# Altium PCB Linker.PcbDoc
Units mil, origin at the board's own origin, x right, y up, seen from the top; angles counter-clockwise.
Board outline 1978.54 x 1980.45 mil, 2 copper layers (Top Layer, Bottom Layer); 10 components, 0 nets, 42 pads, 0 vias.
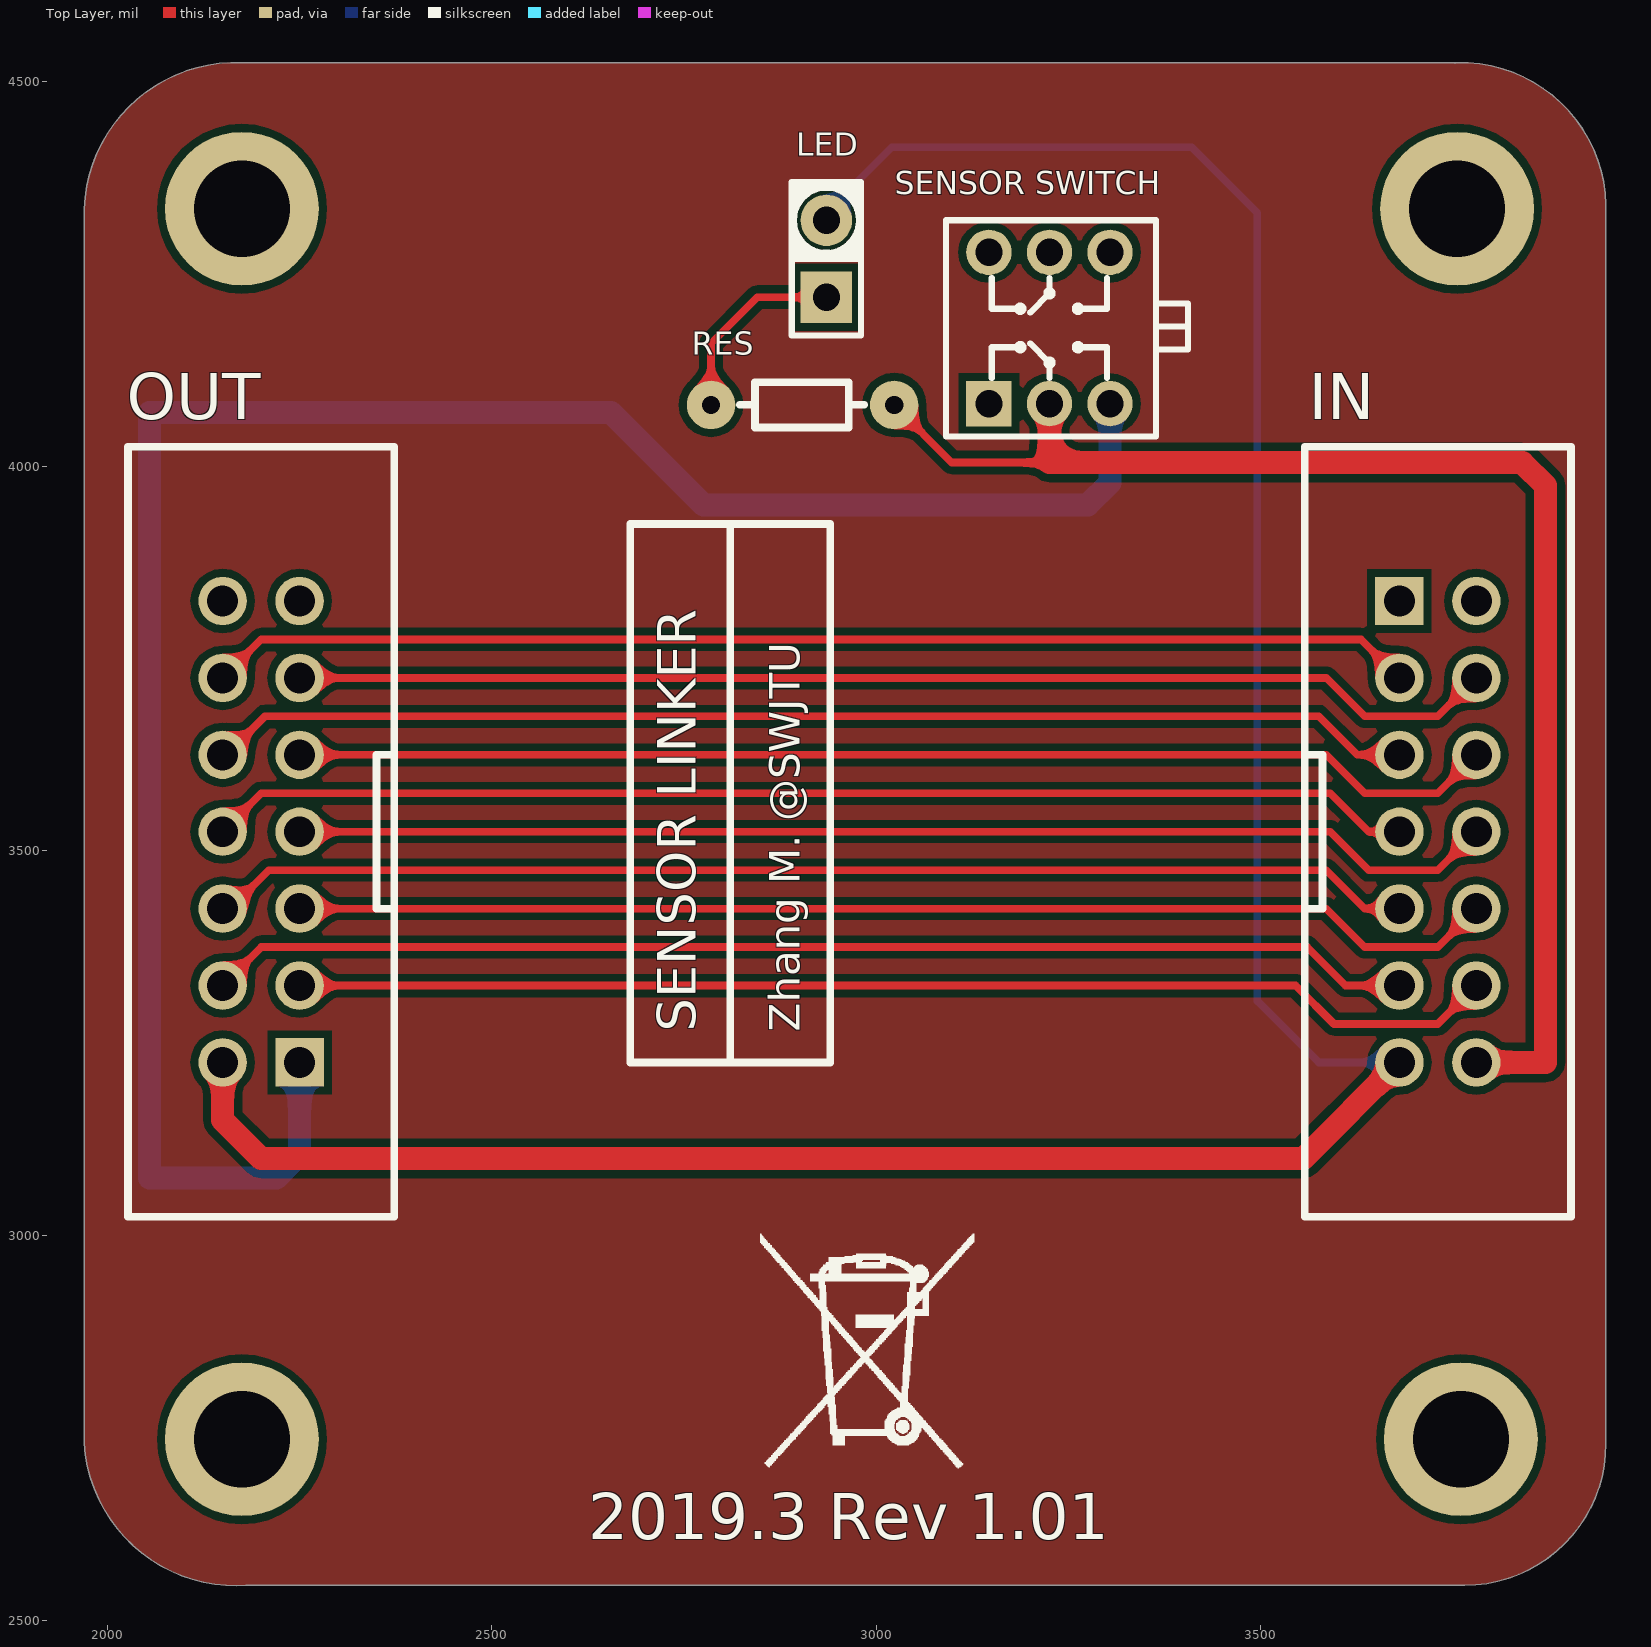
[diagram p0: Top Layer view]
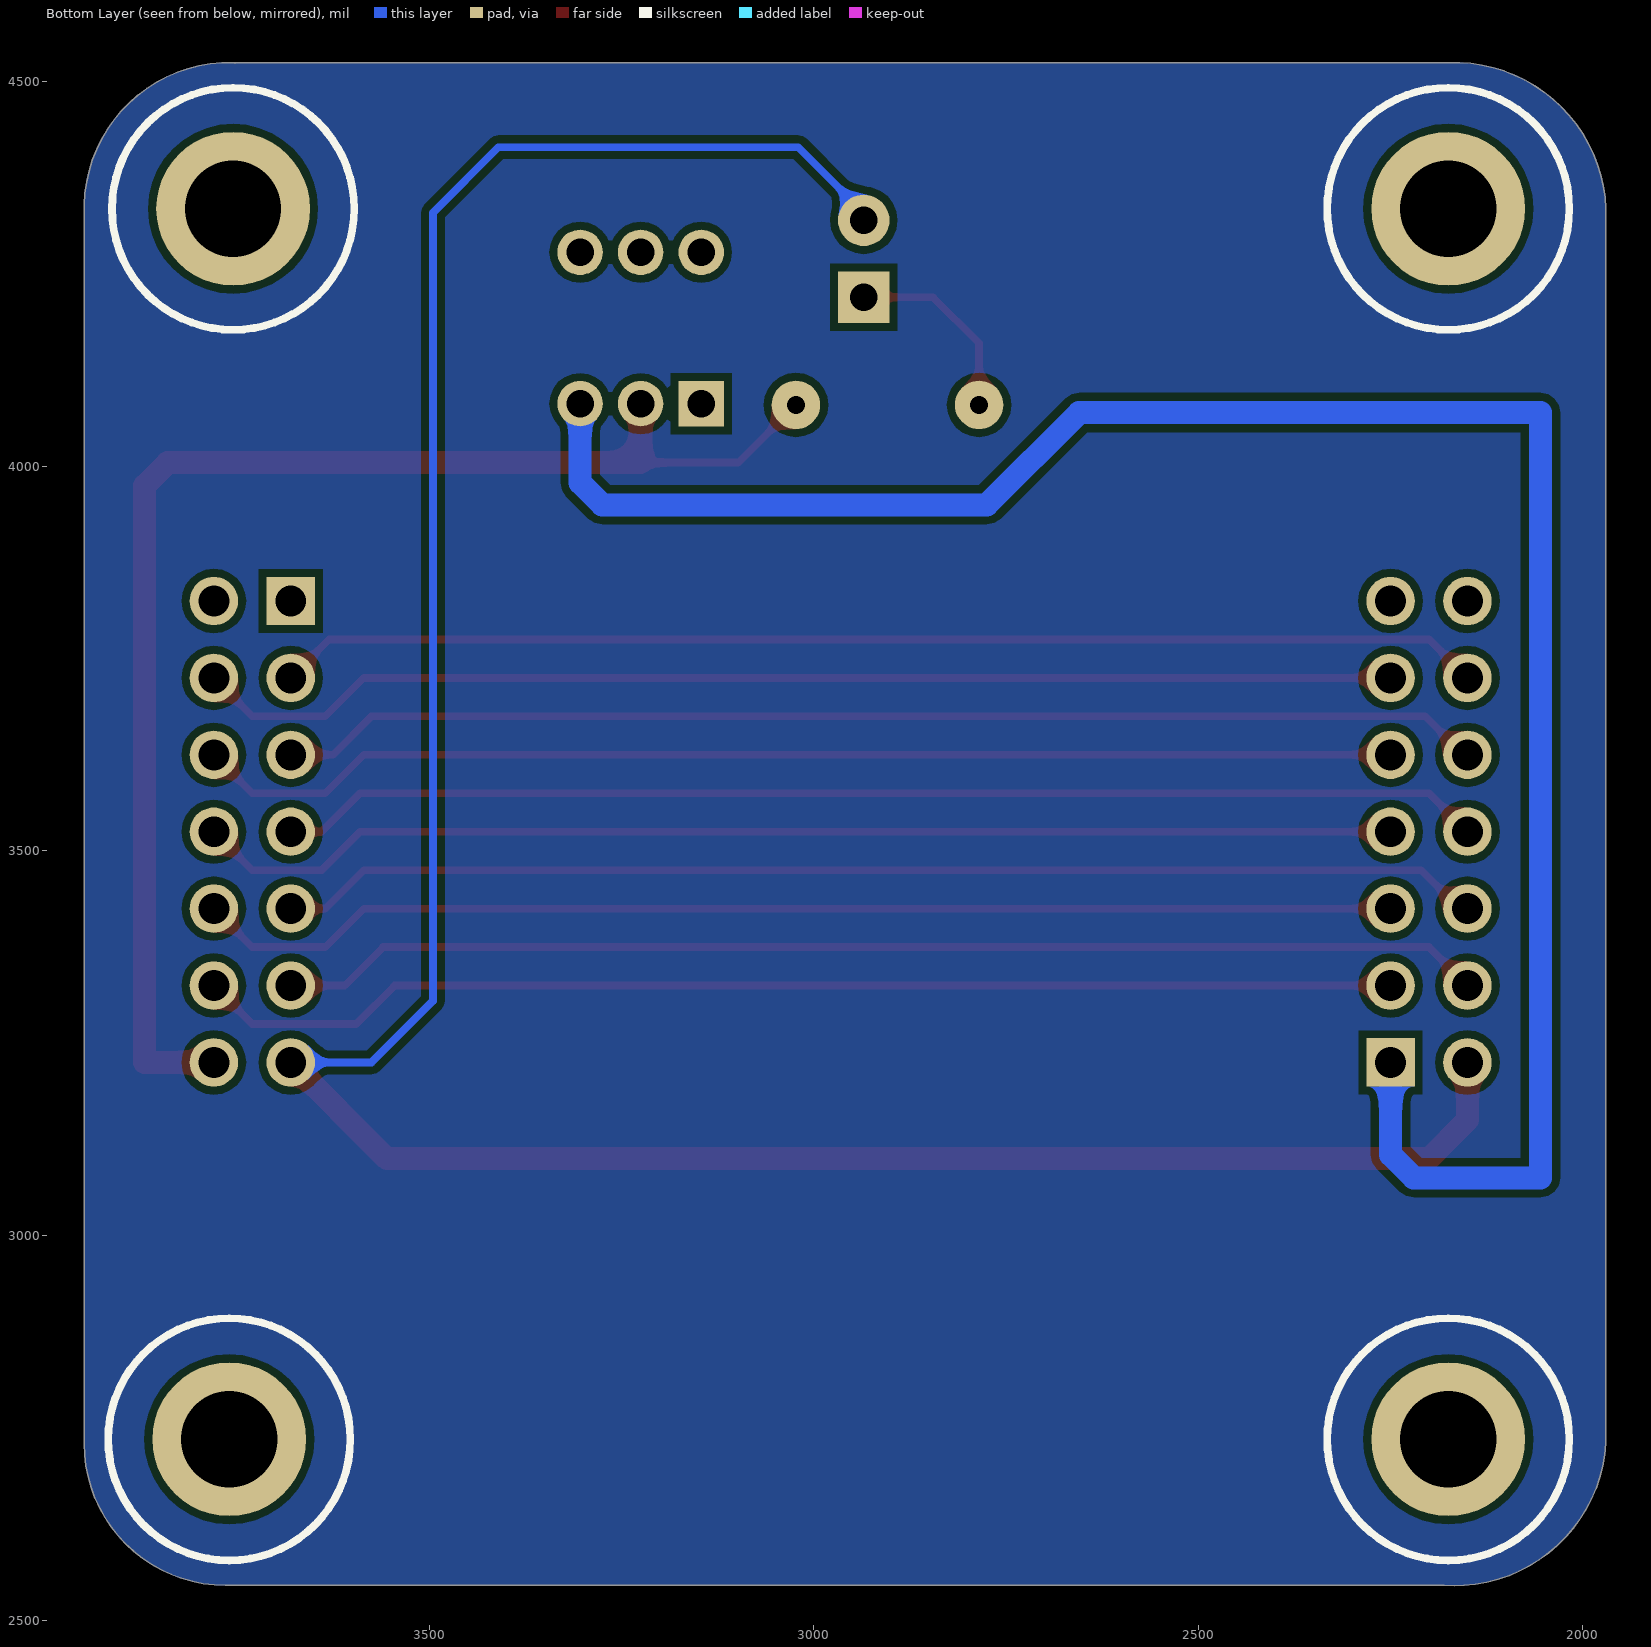
[diagram p1: Bottom Layer view, seen from below]

## Layer stack, top to bottom
Top Solder: solder mask 0.4, Solder Resist, Dk 3.5
Top Layer: signal copper 1.4
Dielectric 1: dielectric 12.6, FR-4, Dk 4.8
Bottom Layer: signal copper 1.4
Bottom Solder: solder mask 0.4, Solder Resist, Dk 3.5

## Board outline
1970,2729.68 cw(c1975,2730) 1969.98,2730 1969.98,4335 cw(c1975,4335) 1969.99,4335.2 cw(c2167.5,4327.5) 2175.1,4525.02 3750,4525.02 cw(c3750,4520) 3752.5,4524.35 cw(c3755,4520) 3754.88,4525.01 cw(c3759.25,4335.75) 3948.52,4340.12 cw(c3943.5,4340) 3948.52,4340 cw(c3943.5,4340) 3948.52,4339.94 3948.52,2730.05 cw(c3943.5,2730) 3948.52,2730.02 cw(c3764.25,2729.25) 3948.52,2729.25 cw(c3764.25,2729.25) 3765.02,2544.99 cw(c3765,2550) 3765,2544.99 2180.16,2544.99 cw(c2167.5,2742.5) 2154.68,2545 cw(c2167.5,2742.5)

## Design rules (kind name [scope] priority, off if disabled: settings)
Clearance [All] p1: gap=10 ignorepadtopadclearanceinfootprint=FALSE except(0: Arc-Hole Track-Hole SMDPad-Hole THPad-Hole Via-Hole Fill-Hole Poly-Hole Region-Hole Text-Hole)
PolygonConnect [All] p1: connectstyle=Relief reliefconductorwidth=10 reliefentries=4 polygonreliefangle="90 Angle" airgapwidth=10
RoutingVias [All] p1: holewidth=28 width=50 viastyle="Through Hole" minholewidth=28 minwidth=50 maxholewidth=28 maxwidth=50
SolderMaskExpansion [All] p1: expansion=4
Width [All] p1: maxlimit=100 minlimit=10 preferedwidth=10 minimp=50.000000 maximp=50.000000 favimp=50.000000
30 further rules are at their usual default settings.

## Components (designator, comment, footprint, x,y, rotation, side; value= is the part's Value field where it differs from the comment)
IN "Comment" DC-2.54-L-Z-14P 3730,3525 r270 top
LED "Comment" "LED F257-Y" 2935,4270 r90 top
OUT "Comment" DC-2.54-L-Z-14P 2200,3525 r90 top
RES "Comment" "RS 1/8W" 2905,4080 r0 top
"SENSOR SWITCH" "Comment" "KFT DIP-7X7" 3225,4180 r0 top
? "Comment" ICO3 2990,2850 r0 top
? "Comment" M3x8+6_L 3760,2735 r270 bottom
? "Comment" M3x8+6_L 2175,2735 r270 bottom
? "Comment" M3x8+6_L 3755,4335 r270 bottom
? "Comment" M3x8+6_L 2175,4335 r270 bottom

## Footprints (in the part's own frame and the unit in brackets; to place one, negate y for a bottom-side part, rotate by r counter-clockwise, add the part's x,y. Pads: shape width x height; smd on the part's side, far side on the other; paste and mask are expansions set on the pad)
DC-2.54-L-Z-14P [mm] "立式直插简牛插座，间距2.54（蒜米工坊）"
  rect 1.6x1.6 hole 1.02: 1(-7.62,-1.27)
  round 1.6 hole 1.02: 2(-7.62,1.27) 3(-5.08,-1.27) 4(-5.08,1.27) 5(-2.54,-1.27) 6(-2.54,1.27) 7(0,-1.27) 8(0,1.27) 9(2.54,-1.27) 10(2.54,1.27) 11(5.08,-1.27) 12(5.08,1.27) 13(7.62,-1.27) 14(7.62,1.27)
  silkscreen extent -12.72,-4.4 12.72,4.4, body extent -12.72,-4.4 12.71,4.7, height 8.8
ICO3 [mil]
  silkscreen extent -141,-152 137,152
"KFT DIP-7X7" [mm] "自锁开关，规格：7*7mm"
  rect 1.5x1.5 hole 0.9: 1(-2,-2.5)
  round 1.5 hole 0.9: 2(0,-2.5) 3(2,-2.5) 4(2,2.5) 5(0,2.5) 6(-2,2.5)
  silkscreen extent -3.42,-3.58 4.58,3.56, body extent -3.5,-3.5 3.5,3.5, height 11.2
"LED F257-Y" [mm] "黄色2mm*5mm*7mm(长*宽*高)"
  rect 1.7x1.7 hole 0.9: 1(-1.27,0)
  round 1.7 hole 0.9: 2(1.27,0)
  silkscreen extent -2.54,-1.14 2.54,1.14, body extent -2.5,-1 2.5,1, height 7.05
M3x8+6_L [mil] "M3铜柱，长：8mm，螺纹长：6mm"
  round 200 hole 125: 1(0,0)
  silkscreen extent -157,-157 157,157, body extent -106,-93 106,93, height 317
"RS 1/8W" [mm] "直插色环电阻，脚距6mm，直径1.5mm"
  round 1.6 hole 0.6: 1(-3.048,0) 2(3,0)
  silkscreen extent -2.1,-0.75 2,0.75, body extent -3.22,-0.76 3.23,0.76, height 1.52

## Nets (pads, with @x,y where several pads share a name; then routed paths per layer and width w, separated by ;. In a path a pad name is that pad's centre, name@x,y a point inside that pad or via, vN(x,y) a via of type N, cw(c..) or ccw(c..) an arc to the next point about the centre after c; other vN are vias at no path point)
pads on no net: "SENSOR SWITCH.1" "SENSOR SWITCH.2" "SENSOR SWITCH.3" "SENSOR SWITCH.4" "SENSOR SWITCH.5" "SENSOR SWITCH.6" ?.1 IN.1 IN.2 IN.3 IN.4 IN.5 IN.6 IN.7 IN.8 IN.9 IN.10 IN.11 IN.12 IN.13 IN.14 LED.1 LED.2 OUT.1 OUT.2 OUT.3 OUT.4 OUT.5 OUT.6 OUT.7 OUT.8 OUT.9 OUT.10 OUT.11 OUT.12 OUT.13 OUT.14 RES.1 RES.2
copper on no net: | length 24082.7
  Top Layer w10: 2140,3725 2150,3725 2200,3775 3630,3775 3680,3725 ; 2150,3325 2200,3375 3560,3375 3610,3325 3680,3325 ; 2150,3425 2160,3425 2210,3475 3585,3475 3635,3425 3680,3425 ; 2150,3525 2200,3575 3590,3575 3640,3525 3680,3525 ; 2150,3625 2155,3625 2205,3675 3575,3675 3625,3625 3680,3625 ; 2250,3325 3545,3325 3595,3275 3730,3275 3780,3325 ; 2250,3425 3585,3425 3635,3375 3730,3375 3780,3425 ; 2250,3525 3590,3525 3640,3475 3730,3475 3780,3525 ; 2250,3625 3585,3625 3635,3575 3730,3575 3780,3625 ; 2250,3725 3585,3725 3635,3675 3730,3675 3780,3725 ; 2785,4080 2785,4160 2845,4220 2935,4220 ; 3023.11,4080 3098.11,4005 3225,4005
  Top Layer w30: 2150,3225 2150,3150 2200,3100 3555,3100 3680,3225 ; 3225,4081.57 3225,4005 3840,4005 3870,3975 3870,3225 3780,3225
  Bottom Layer w10: 2935,4320 2935,4330 3020,4415 3395,4415 3410,4415 3495,4330 3495,3305 3575,3225 3680,3225
  Bottom Layer w30: 2250,3225 2250,3105 2220,3075 2055,3075 2055,4070 2655,4070 2775,3950 3275,3950 3303.74,3978.74 3303.74,4081.57

## Polygon pours and split planes (outlines as drawn)
no net on Bottom Layer "Top Layer-No Net1" (solid, pour order 13): 1970,2729.68 cw(c1975,2730) 1969.98,2730 1969.98,4335 cw(c1975,4335) 1969.99,4335.2 cw(c2167.5,4327.5) 2175.1,4525.02 3750,4525.02 cw(c3750,4520) 3752.5,4524.35 cw(c3755,4520) 3754.88,4525.01 cw(c3759.25,4335.75) 3948.52,4340.12 cw(c3943.5,4340) 3948.52,4340 cw(c3943.51,4340) 3948.52,4339.94 3948.52,2730.05 cw(c3943.49,2729.99) 3948.52,2730.02 cw(c3764.26,2729.25) 3948.52,2729.25 cw(c3764.25,2729.25) 3765.02,2544.99 cw(c3765.01,2549.99) 3765,2544.99 2180.16,2544.99 cw(c2167.5,2742.5) 2154.68,2545 cw(c2167.5,2742.5)
no net on Top Layer "Top Layer-No Net" (solid, pour order 12): 1970,2729.68 cw(c1975,2730) 1969.98,2730 1969.98,4335 cw(c1975,4335) 1969.99,4335.2 cw(c2167.5,4327.5) 2175.1,4525.02 3750,4525.02 cw(c3750,4520) 3752.5,4524.35 cw(c3755,4520) 3754.88,4525.01 cw(c3759.25,4335.75) 3948.52,4340.12 cw(c3943.5,4340) 3948.52,4340 cw(c3943.51,4340) 3948.52,4339.94 3948.52,2730.05 cw(c3943.49,2729.99) 3948.52,2730.02 cw(c3764.26,2729.25) 3948.52,2729.25 cw(c3764.25,2729.25) 3765.02,2544.99 cw(c3765.01,2549.99) 3765,2544.99 2180.16,2544.99 cw(c2167.5,2742.5) 2154.68,2545 cw(c2167.5,2742.5)

## Silkscreen, mask and mechanical layers (free items; w line width, h text height)
Top Overlay:
  lines w10: 2810,3225 2810,3925 ; 2680,3225 2940,3225 2940,3925 2680,3925 2680,3225
  text "SENSOR LINKER" at 2765,3265 h50 r90
  text "Zhang M. @SWJTU" at 2900,3265 h40 r90
  text "2019.3 Rev 1.01" at 2625,2605 h60
Mechanical 1:
  lines w10: 2155,2550 3765,2550 ccw(c3764.25,2729.25) 3943.5,2730 3943.5,4340 ccw(c3759.25,4335.75) 3755,4520 ; 2160,4520 3750,4520 ; 2175,4520 ccw(c2167.5,4327.5) 1975,4335 1975,2730 ccw(c2167.5,2742.5) 2180,2550